# EAGLE board cell (EAGLE 9.2.2)
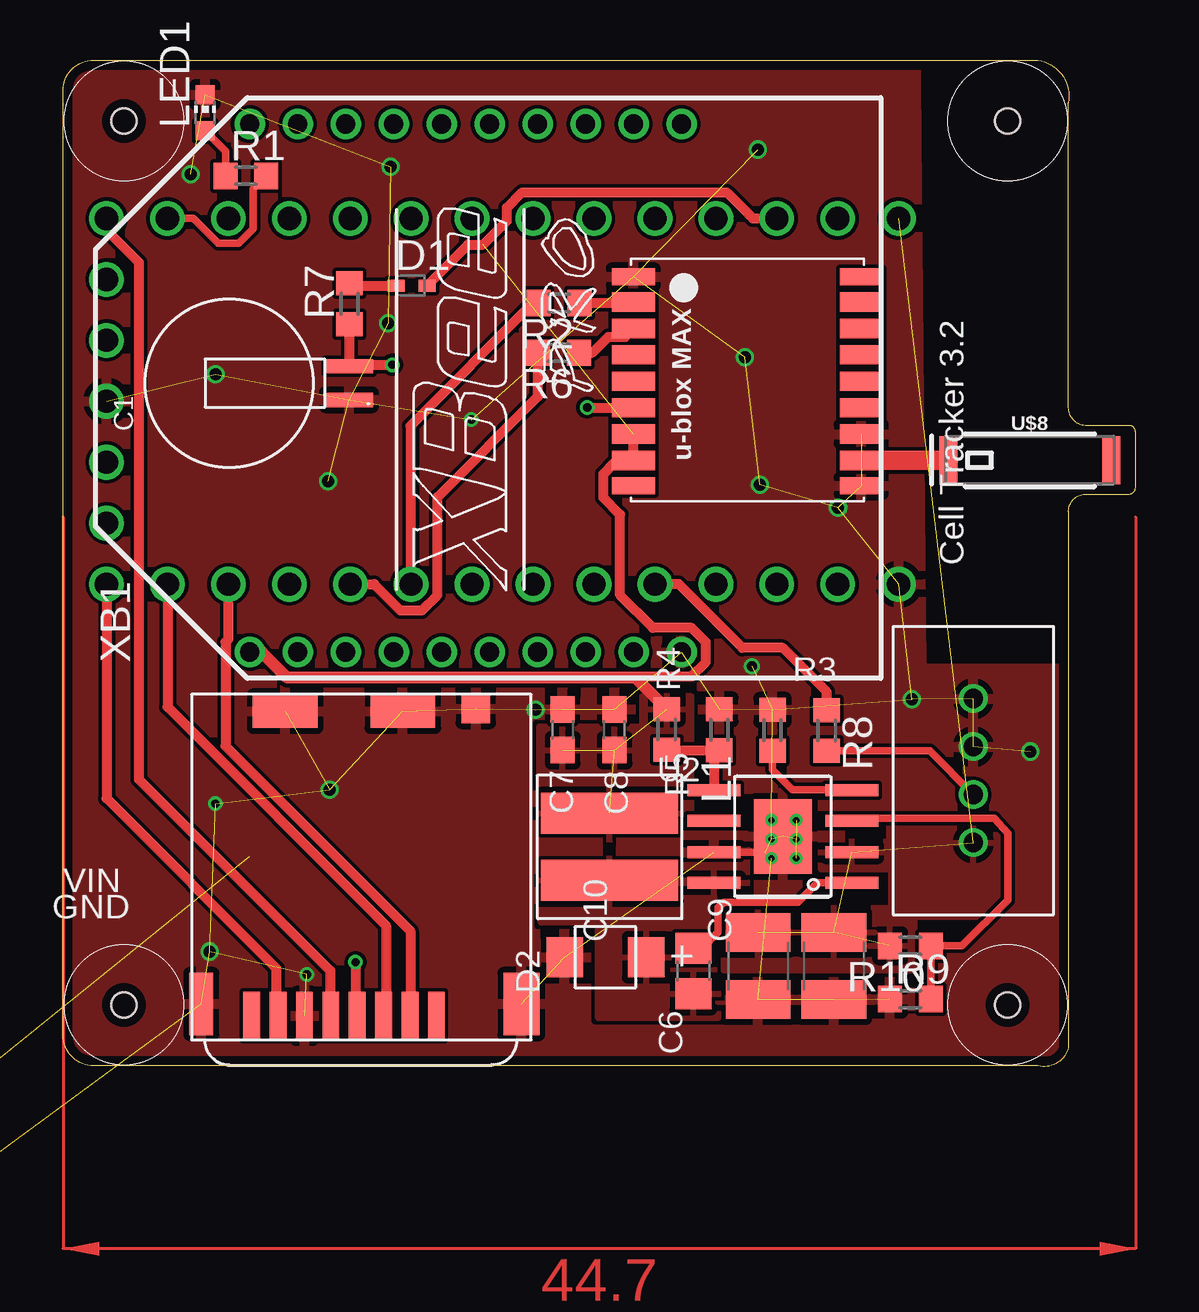
[diagram p0: board, top side]
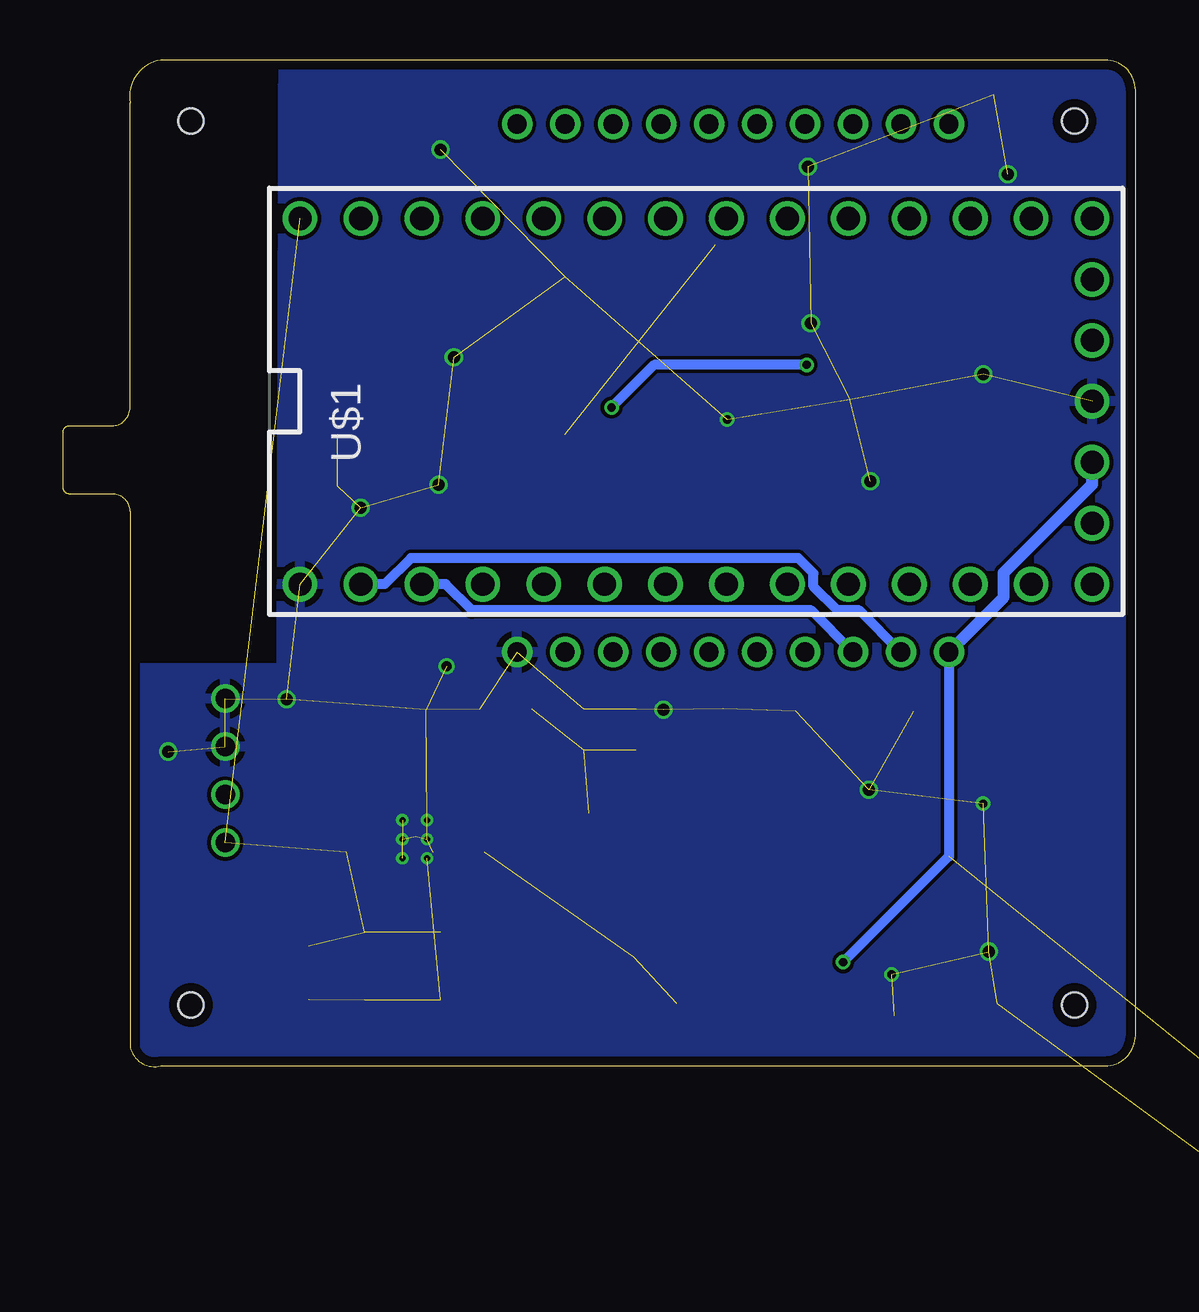
[diagram p1: board, bottom side, seen from below]

Size 44.71 x 41.94 mm. Coordinates in mm from the lower left corner, seen from the top.
Outline: 0,1.3 0,40.67 arc-90 1.27,41.94 40.64,41.94 arc-90 41.91,40.16 41.91,27.46 arc90 42.67,26.7 44.45,26.7 arc-90 44.7,26.45 44.7,24.16 arc-90 44.45,23.86 42.67,23.86 arc90 41.91,23.14 41.91,0.79 arc-90 40.64,0.03 1.27,0.03 arc-90 0,1.3
Copper layers (1*16): Top 0.035559375mm / dielectric 1.6mm / Bottom 0.035559375mm
Design rules "oshpark-2layer": minimum track width 6mil, minimum drill 10mil, track to track 6mil, track to pad 6mil, pad to pad 6mil, via to via 6mil, smd to smd 6mil, copper to edge 15mil, drill to drill 6mil, minimum pad ring 5mil, minimum via ring 5mil, stop-mask expansion 2.5mil, vias tented up to drill 0mil, thermal gap 10mil
Holes 1.05 mm at 2.54,39.4 39.37,39.4 2.54,2.57 39.37,2.57

## Footprints (pad centres in the part's own frame; a part is rotated, then mirrored left to right if it is on the bottom)
ELNASUPERCAP = smd 0.6 x 2: 3V3 0.7,-1.5; GND -0.7,-1.5
C0603 = smd 1.1 x 1: 1 -0.85,0; 2 0.85,0
C0805 = smd 1.3 x 1.5: 1 -0.95,0; 2 0.95,0
C1210 = smd 1.6 x 2.7: 1 -1.4,0; 2 1.4,0
SOD523 = smd 0.7 x 0.5: A 0.7,0; C -0.6,0
DO-214AC = smd 1.524 x 1.676: P$1 -1.702,0; P$2 1.702,0
8-SOIC = smd 0.72 x 1.78: P$1 0.36,0.89; P$2 1.63,0.89; P$3 2.9,0.89; P$4 4.17,0.89; P$5 4.17,5.57; P$6 2.9,5.57; P$7 1.63,5.57; P$8 0.36,5.57
ABRACON = smd 1.7 x 5.7: P$1 1.4,0; P$2 -1.4,0
CHIP-LED0603 = smd 0.8 x 0.8: A 0,-0.75; C 0,0.75
R0603 = smd 1 x 1.1: 1 -0.85,0; 2 0.85,0
SO8 = smd 0.5 x 2.2: P$1 -1.92,-2.875; P$2 -0.65,-2.875; P$3 0.65,-2.875; P$4 1.92,-2.875; P$5 1.92,2.875; P$6 0.65,2.875; P$7 -0.65,2.875; P$8 -1.92,2.875 | smd 3.1 x 2.4: PAD 0,0
TEENSY_3.0-3.2&LC_OUTER_ROW = drill 0.965: 0 -7.62,13.97; 1 -7.62,11.43; 2 -7.62,8.89; 3 -7.62,6.35; 3.3V 7.62,11.43; 3.3V1 -2.54,-16.51; 4 -7.62,3.81; 5 -7.62,1.27; 6 -7.62,-1.27; 7 -7.62,-3.81; 8 -7.62,-6.35; 9 -7.62,-8.89; 10 -7.62,-11.43; 11 -7.62,-13.97; 12 -7.62,-16.51; 13 7.62,-16.51; 14/A0 7.62,-13.97; 15/A1 7.62,-11.43; 16/A2 7.62,-8.89; 17/A3 7.62,-6.35; 18/A4 7.62,-3.81; 19/A5 7.62,-1.27; 20/A6 7.62,1.27; 21/A7 7.62,3.81; 22/A8 7.62,6.35; 23/A9 7.62,8.89; AGND 7.62,13.97; GND -7.62,16.51; GND1 0,-16.51; PGM 2.54,-16.51; RESET/DAC 5.08,-16.51; VBAT -5.08,-16.51; VIN 7.62,16.51
MICRO_SD_HINGED = smd 0.7 x 2: CD -1.1,-13.4; CLK -4.4,-13.4; CMD -2.2,-13.4; DAT0 -6.6,-13.4; DAT1 -7.7,-13.4; DAT2 0,-13.4; VDD -3.3,-13.4; VSS -5.5,-13.4 | smd 2.7 x 1.4: CD1 -1.4,-0.7; GND3 -6.3,-0.7 | smd 1.5 x 2.6: GND1 3.55,-12.9 | smd 1.2 x 1.2: GND2 1.65,-0.6 | smd 1 x 2.6: GND4 -9.8,-12.9
4_PIN_MICROCLASP = drill 0.8: P$1 -1,0; P$2 -3,0; P$3 1,0; P$4 3,0
MAX-M8 = smd 1.8 x 0.7: 1_GND 4.95,-4.4; 9_RESET_N 4.95,4.3; 10_GND -4.55,4.3; 18_SAFEBOOT_N -4.55,-4.4 | smd 1.8 x 0.8: 2_TXD 4.95,-3.35; 3_RXD 4.95,-2.25; 4_TIMEPULSE 4.95,-1.15; 5_EXTINT 4.95,-0.05; 6_V_BCKP 4.95,1.05; 7_VCC_IO 4.95,2.15; 8_VCC 4.95,3.25; 11_RF_IN -4.55,3.25; 12_GND -4.55,2.15; 13_LNA_EN -4.55,1.05; 14_VCC_RF -4.55,-0.05; 15_V_ANT/RESERVED -4.55,-1.15; 16_SDA -4.55,-2.25; 17_SCL -4.55,-3.35
SPARKFUN-GPS_ANT-GPS-2X7MM = smd 0.75 x 2: 1 -3.4,0; NC 3.4,0
XBEE-PRO = drill 0.8 pad 1.27: 1 -11,9; 2 -11,7; 3 -11,5; 4 -11,3; 5 -11,1; 6 -11,-1; 7 -11,-3; 8 -11,-5; 9 -11,-7; 10 -11,-9; 11 11,-9; 12 11,-7; 13 11,-5; 14 11,-3; 15 11,-1; 16 11,1; 17 11,3; 18 11,5; 19 11,7; 20 11,9

## Placement (x,y rotation side)
C1  [ELNASUPERCAP]  10.41,28.48 90 top
C2  0.1uF  [C0603]  -17.53,-16.23 0 top  (outside the outline)
C3  0.1uF  [C0603]  -17.53,-19.78 0 top  (outside the outline)
C6  0.1 uF  [C0805]  26.27,3.98 90 top
C7  .18uF  [C0603]  20.83,14.03 90 top
C8  10 uF  [C0603]  22.99,14.03 90 top
C9  10 uF  [C1210]  32.13,4.19 270 top
C10  2.2 uF  [C1210]  28.97,4.19 270 top
D1  RB520S30T1G  [SOD523]  14.48,32.54 0 top
D2  DO-214AC  [DO-214AC]  22.61,4.56 0 top
ISO7021  ISO7021  [8-SOIC]  -18.03,-12.67 0 top  (outside the outline)
L1  ASPI-6045S-560M-TCT-ND  [ABRACON]  22.78,9.16 270 top
LED1  Green  [CHIP-LED0603]  5.92,39.74 0 top
R1  470  [R0603]  7.62,37.11 0 top
R2  22  [R0603]  20.68,31.82 180 top
R3  23.3k  [R0603]  29.58,14.02 270 top
R4  340k  [R0603]  25.16,14.05 90 top
R5  100k  [R0603]  27.35,14.03 270 top
R6  22  [R0603]  20.65,29.74 180 top
R7  22  [R0603]  11.94,31.78 90 top
R8  470  [R0603]  31.83,14 270 top
R9  30.1k  [R0603]  35.32,2.81 0 top
R10  140k  [R0603]  35.32,5.03 180 top
U2  LMR16020  [SO8]  30,9.59 90 top
U$1  TEENSY_3.1-3.2_OUTER_ROW  [TEENSY_3.0-3.2&LC_OUTER_ROW]  18.32,27.72 90 bottom
U$3  MICRO_SD  [MICRO_SD_HINGED]  15.56,15.51 0 top
U$4  MICROCLASP_4  [4_PIN_MICROCLASP]  37.94,12.33 90 top
U$7  MAX-M8  [MAX-M8]  28.72,28.5 180 top
U$8  1.575GHz  [SPARKFUN-GPS_ANT-GPS-2X7MM]  40.29,25.26 0 top
XB1  XBEE-LTE-M  [XBEE-PRO]  16.78,28.27 90 top

## Library data of the parts
C1 ISO7021 = jmolterLib
C2 C3 = rcl; SPICEPREFIX: C
C6-C10 R1 R3-R5 R7-R10 = resistor
D1 = diode
D2 U2 = HASP
L1 = inductors
LED1 = led
R2 R6 = rcl
U$1 = Teensy_3_and_LC_Series_Boards_v1.4
U$3 U$4 = NR_connectors
U$7 = ubloxLib
U$8 = Tracksoar v2 ; PROD_ID: ANT-09087; SF_ID: GPS-09131
XB1 = maxstream; MPN: XBP24-AWI-001; OC_FARNELL: 1337916; OC_NEWARK: 42M2667

## Nets
9_V_RESET_N: U$7.9_RESET_N
+3V3: C2.1 C7.1 C8.1 D1.A ISO7021.P$1 L1.P$2 R4.2 U$1.3.3V U$1.3.3V1 U$3.VDD U$7.7_VCC_IO U$7.8_VCC XB1.1
AGND: U$1.AGND
EN: R9.2 R10.1 U2.P$3
FB: R4.1 R5.2 U2.P$5
GND: C1.GND C2.2 C7.2 C8.2 C9.2 C10.2 D2.P$1 ISO7021.P$4 LED1.C R3.1 R5.1 R9.1 U2.P$7 U2.PAD U$1.GND U$1.GND1 U$3.CD1 U$3.GND1 U$3.GND2 U$3.GND3 U$3.GND4 U$3.VSS U$4.P$3 U$4.P$4 U$7.1_GND U$7.10_GND U$7.12_GND XB1.10
GND_EX: C3.2 ISO7021.P$5
IN_A: ISO7021.P$7
IS_RX: ISO7021.P$2
IS_TX: ISO7021.P$3
MISO: U$1.12 U$3.DAT0
MOSI: U$1.11 U$3.CMD
N$1: U$7.11_RF_IN U$8.1
N$2: R1.2 U$1.14/A0
N$3: R6.1 U$7.3_RXD
N$4: R2.1 U$7.2_TXD
N$5: C1.3V3 R7.1 U$7.6_V_BCKP
N$8: R3.2 U2.P$4
N$9: C6.2 U2.P$1
N$10: LED1.A R1.1
N$11: D1.C R7.2
N$12: R8.2 U$4.P$1
N$15: U$1.4
N$16: U$1.5
N$33: U$1.6
OUT_B: ISO7021.P$6
RX1: U$1.0 XB1.2
RX3: R2.2 U$1.7
SCK: U$1.13 U$3.CLK
SD_CS: U$1.10 U$3.CD
SW: C6.1 D2.P$2 L1.P$1 U2.P$8
SWITCH_LED: R8.1 U$1.3
TX1: U$1.1 XB1.3
TX3: R6.2 U$1.8
VBAT: U$1.VBAT
VCC_EX: C3.1 ISO7021.P$8
VIN: C9.1 C10.1 R10.2 U2.P$2 U$1.VIN U$4.P$2

## Tracks (layer width: path | path; a pad name or v marks a point on that pad's centre or on a via)
+3V3  (via drill 0.35)  (6 unrouted)
  Top 0.406: U$7.7_VCC_IO 23.77,26.19 U$7.8_VCC 23.77,25.18 22.99,25.18 22.52,24.7 22.52,23.71 23.22,23 23.22,19.64 24.59,18.28 26.2,18.28 26.79,17.69 26.79,16.85 26.2,16.26 23.16,16.26 23.11,16.21 | v12.19,4.35 12.19,2.17 U$3.VDD | D1.A 16.88,34.24 17.5,34.24 18.5,35.24 18.5,35.79 19.14,36.43 27.66,36.43 28.6,35.49 28.75,35.34 U$1.3.3V
  Top 0.508: R4.2 23.85,16.21 23.11,16.21 9.34,16.21 8.28,17.27 XB1.1
  Bottom 0.406: XB1.1 7.78,8.76 v12.19,4.35
  Bottom 0.508: XB1.1 5.49,19.56 5.49,20.57 4.76,21.3 3.75,22.32 1.81,24.25 U$1.3.3V1
  pour Top: 26.19,15.43 24.13,15.43 24.13,14.16 19.84,14.16 19.84,9.48 26.19,9.48
EN
  Top 0.305: R9.2 R10.1 37.47,5.03 39.37,6.94 39.37,9.71 38.81,10.35 32.99,10.35 U2.P$3
FB
  Top 0.406: R4.1 25.18,13.18 R5.2 27.13,12.96 U2.P$5
GND  (via drill 0.25, 0.35, 0.41, 0.5)  (50 unrouted)
  Top 0.305: U2.P$7 29.27,8.94 v29.53,8.68
  other vias: 30.56,8.68 30.56,10.27 29.53,10.27 29.53,9.48 28.42,29.56 29.05,24.24 28.97,38.21 13.65,37.5 11.05,24.38 13.54,30.97 6.35,28.84 5.32,37.18 30.56,9.48 6.11,4.79 11.11,11.54 19.68,14.87 35.39,15.3 40.32,13.13 32.31,23.29 28.72,16.68 10.16,3.84 6.35,10.95 17.02,26.95
  pour Bottom (rank 6): -2.54,44.48 35.53,44.48 35.61,16.59 45.79,16.59 45.72,-2.51 -2.54,-2.51
  pour Top (rank 6): -1.27,43.21 35.52,43.21 35.78,16.59 44.67,16.59 44.45,-1.24 -1.27,-1.24
GND_EX  (1 unrouted)
MISO
  Top 0.406: U$1.12 1.81,11.17 8.89,4.09 8.89,2.18 U$3.DAT0
MOSI
  Top 0.406: U$1.11 4.35,14.98 13.46,5.87 13.46,2.21 U$3.CMD
N$1
  Top 0.813: U$7.11_RF_IN arc-90 33.28,25.26 U$8.1
N$2
  Top 0.305: U$1.14/A0 5.42,35.34 6.46,34.3 7.32,34.3 7.93,34.91 7.93,36.58 R1.2
N$3
  Top 0.406: U$7.3_RXD 23.43,30.41 22.72,30.41 22.06,29.74 R6.1
N$4
  Top 0.406: R2.1 23.74,31.82 U$7.2_TXD
N$5  (via drill 0.35)
  Top 0.406: R7.1 11.94,29.2 C1.3V3 11.98,29.24 v13.72,29.24 | v21.84,27.46 21.85,27.45 U$7.6_V_BCKP
  Bottom 0.406: v13.72,29.24 20.07,29.24 v21.84,27.46
N$8
  Top 0.305: R3.2 29.57,12.37 30.4,11.54 32.85,11.54 U2.P$4
N$9
  Top 0.305: C6.2 26.65,4.93 27.3,5.59 27.3,6.62 27.54,6.86 30.64,6.86 31.43,7.65 32.86,7.65 U2.P$1
N$10
  Top 0.305: R1.1 6.77,38.14 LED1.A
N$11
  Top 0.406: R7.2 12.03,32.54 D1.C
N$12
  Top 0.305: R8.2 36.12,13.15 U$4.P$1
RX1
  Bottom 0.406: XB1.2 11.52,19 12.42,19 13.42,20 13.42,20.55 14.06,21.19 30.2,21.19 31.29,20.1 U$1.0
RX3
  Top 0.406: U$1.7 14.51,26.67 14.48,26.7 19.59,31.82 R2.2
SCK
  Top 0.406: U$1.13 1.81,34.85 3.16,33.5 3.16,11.97 11.13,3.99 11.13,2.13 U$3.CLK
SD_CS
  Top 0.406: U$3.CD 14.48,2.13 14.48,5.65 6.77,13.35 6.77,17.69 6.89,17.81 U$1.10
SW
  pour Top (rank 2): 19.92,8.68 28.5,8.68 28.5,6.78 27.3,6.78 27.3,4.08 27.3,2.02 22.3,2.02 22.3,5.98 19.92,5.98
SWITCH_LED
  Top 0.406: R8.1 31.83,15.61 30,17.45 28.32,17.45 25.66,20.1 U$1.3
TX1
  Bottom 0.406: XB1.3 13.52,19 27.66,19 28.75,20.1 U$1.1
TX3
  Top 0.406: U$1.8 12.96,20.1 14.06,19 14.96,19 15.6,19.64 15.6,23.73 19.8,27.93 R6.2
VCC_EX  (1 unrouted)
VIN  (5 unrouted)
  pour Top: 31.59,9.4 34.45,9.4 34.45,10.11 39.58,10.11 39.58,6.22 35.48,6.22 35.48,4 27.54,4 27.54,6.62 34.53,6.62 34.53,8.21 31.59,8.21
(copper drawn outside any net)
  shapes: Top area x2

## Text on the board
tPlace: Cell Tracker 3.2 | VIN | GND